# Altium PCB PCB1.PcbDoc
Units mil, origin at the board's own origin, x right, y up, seen from the top; angles counter-clockwise.
Board outline 1566.93 x 1488.19 mil, 4 copper layers (Top Layer, Int1 (GND), Int2 (PWR), Bottom Layer), stack 62.449 mil thick; 30 components, 72 nets, 200 pads, 2 vias.
Unrouted connection lines stored in the file: 69.
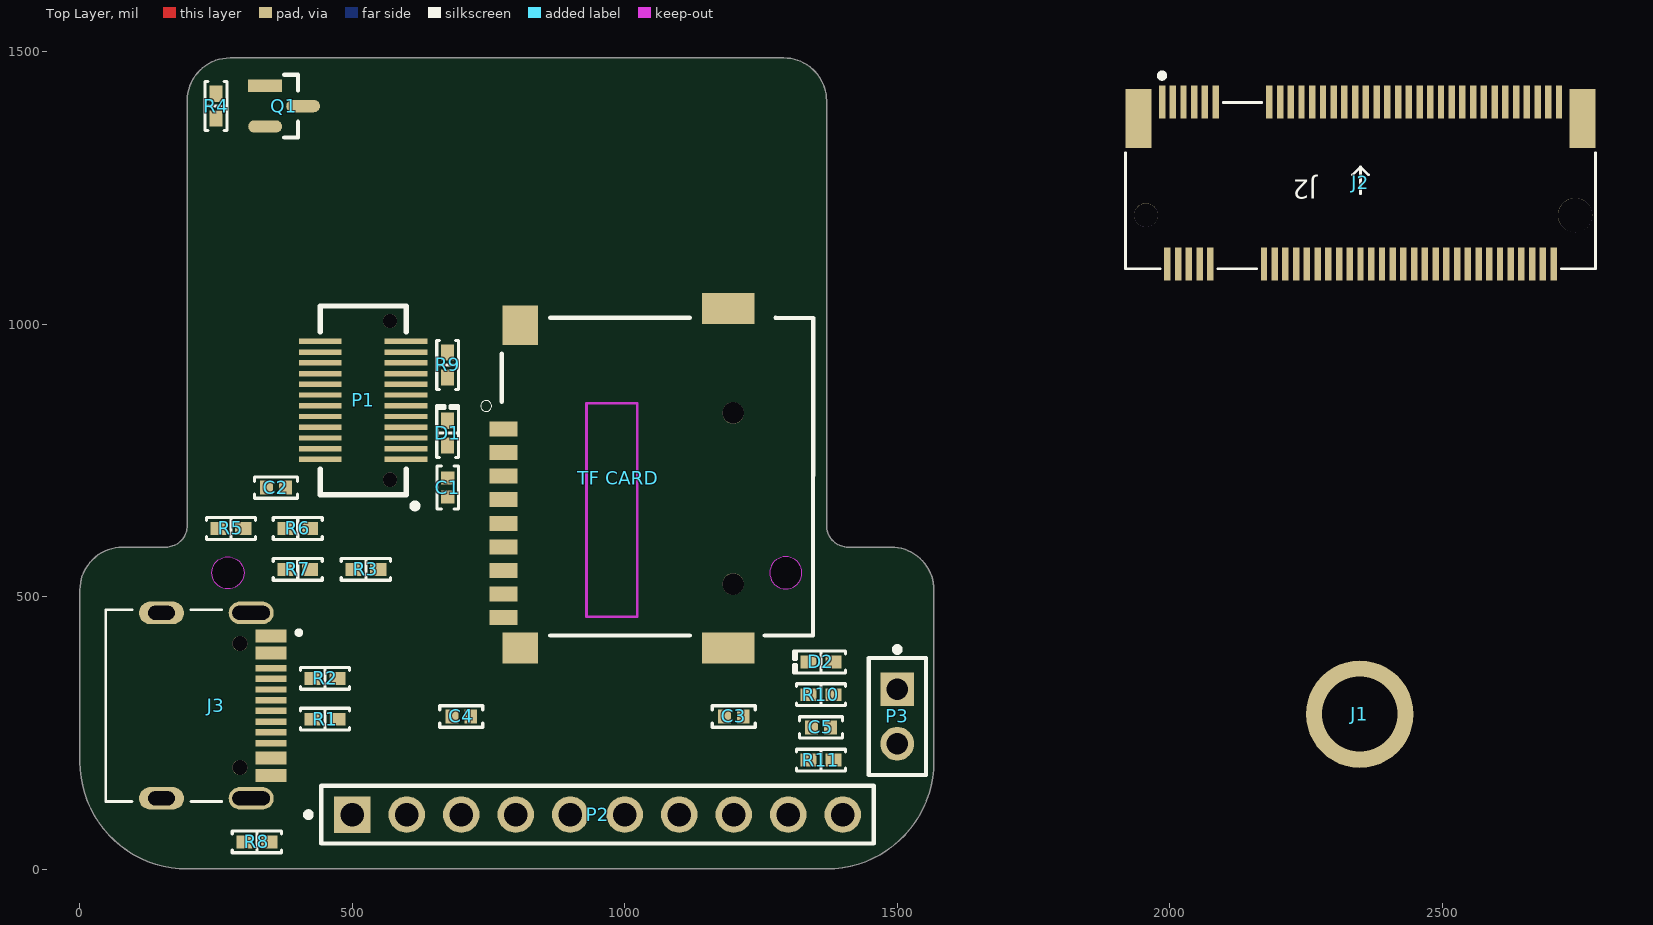
[diagram p0: Top Layer view]
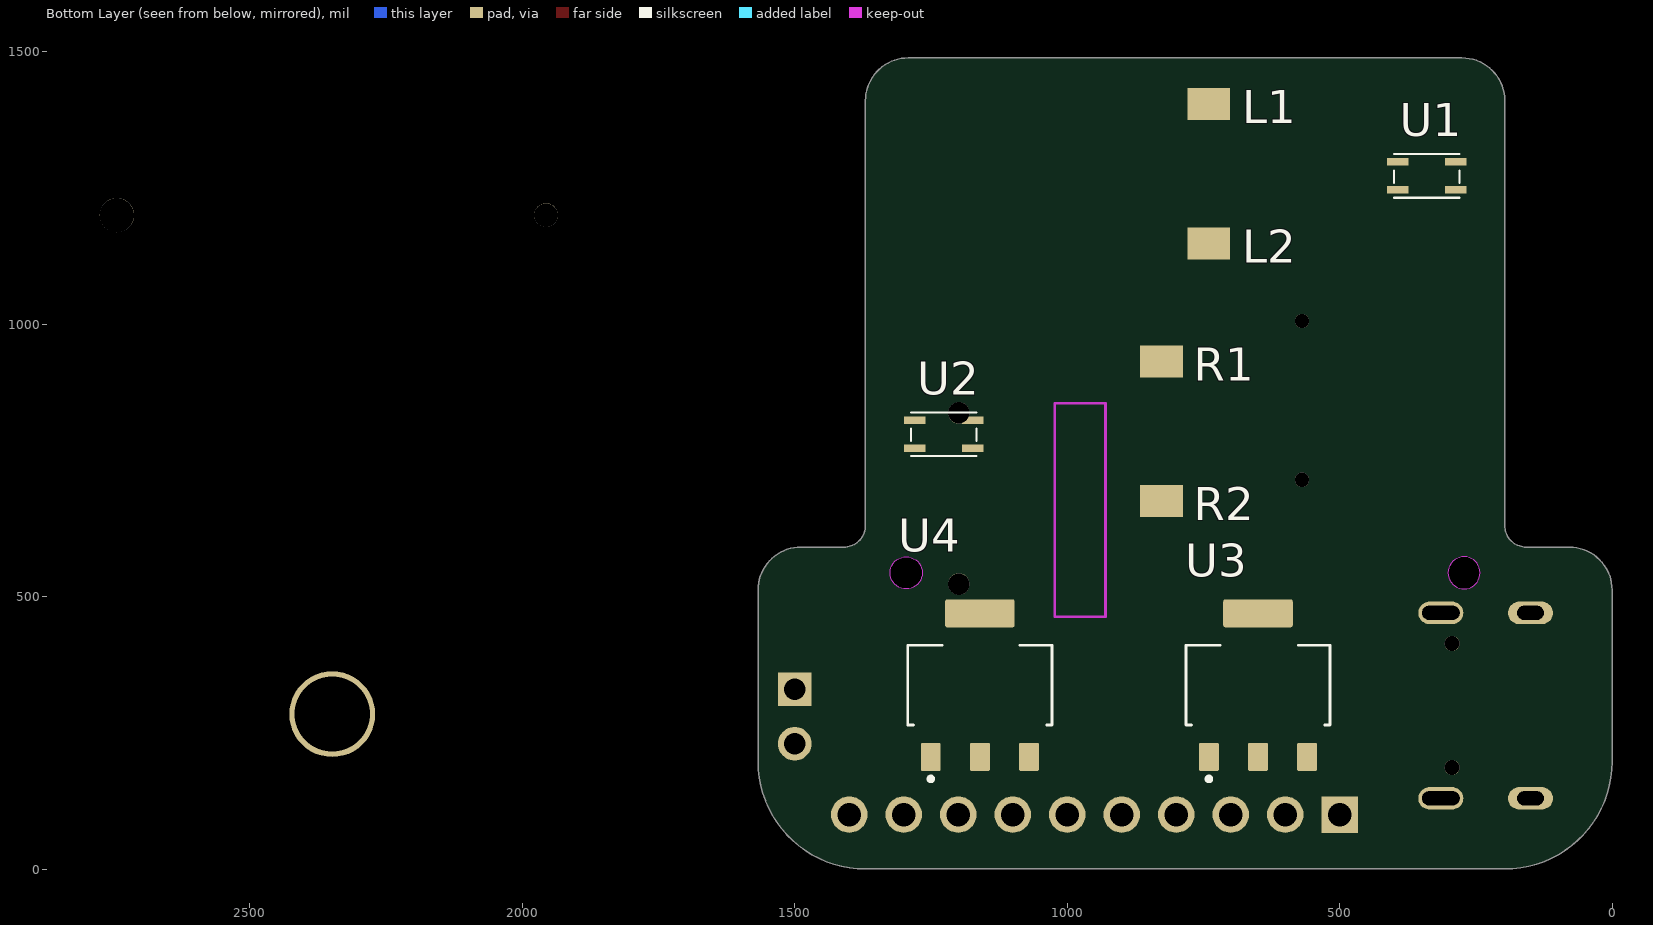
[diagram p1: Bottom Layer view, seen from below]
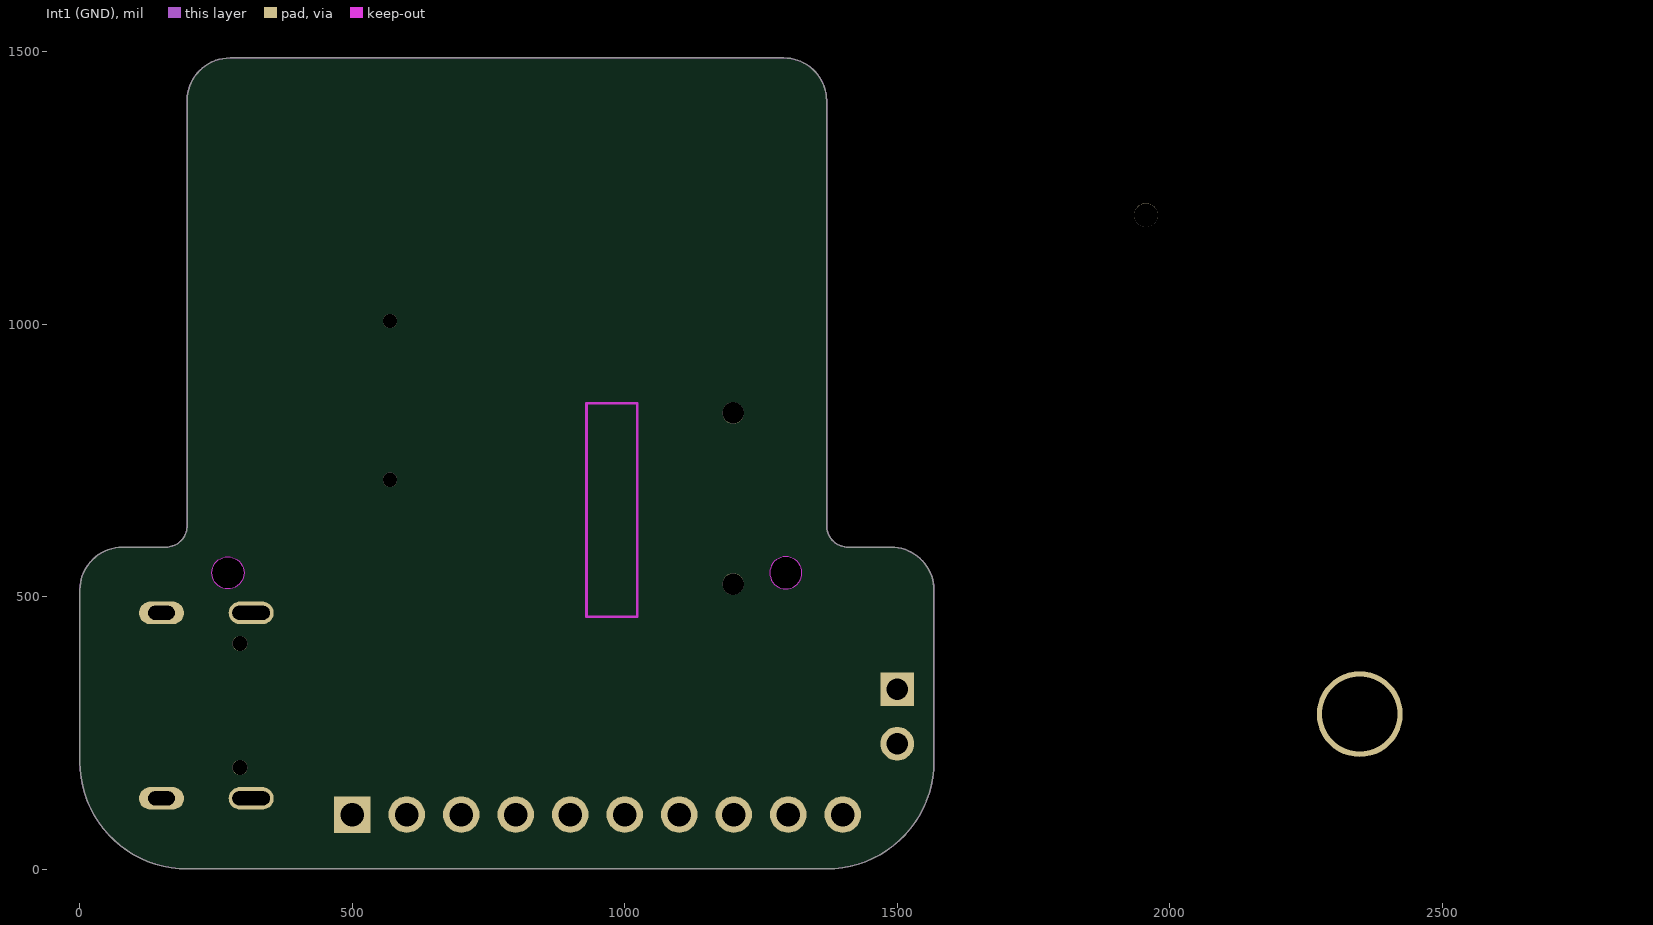
[diagram p2: Int1 (GND)]
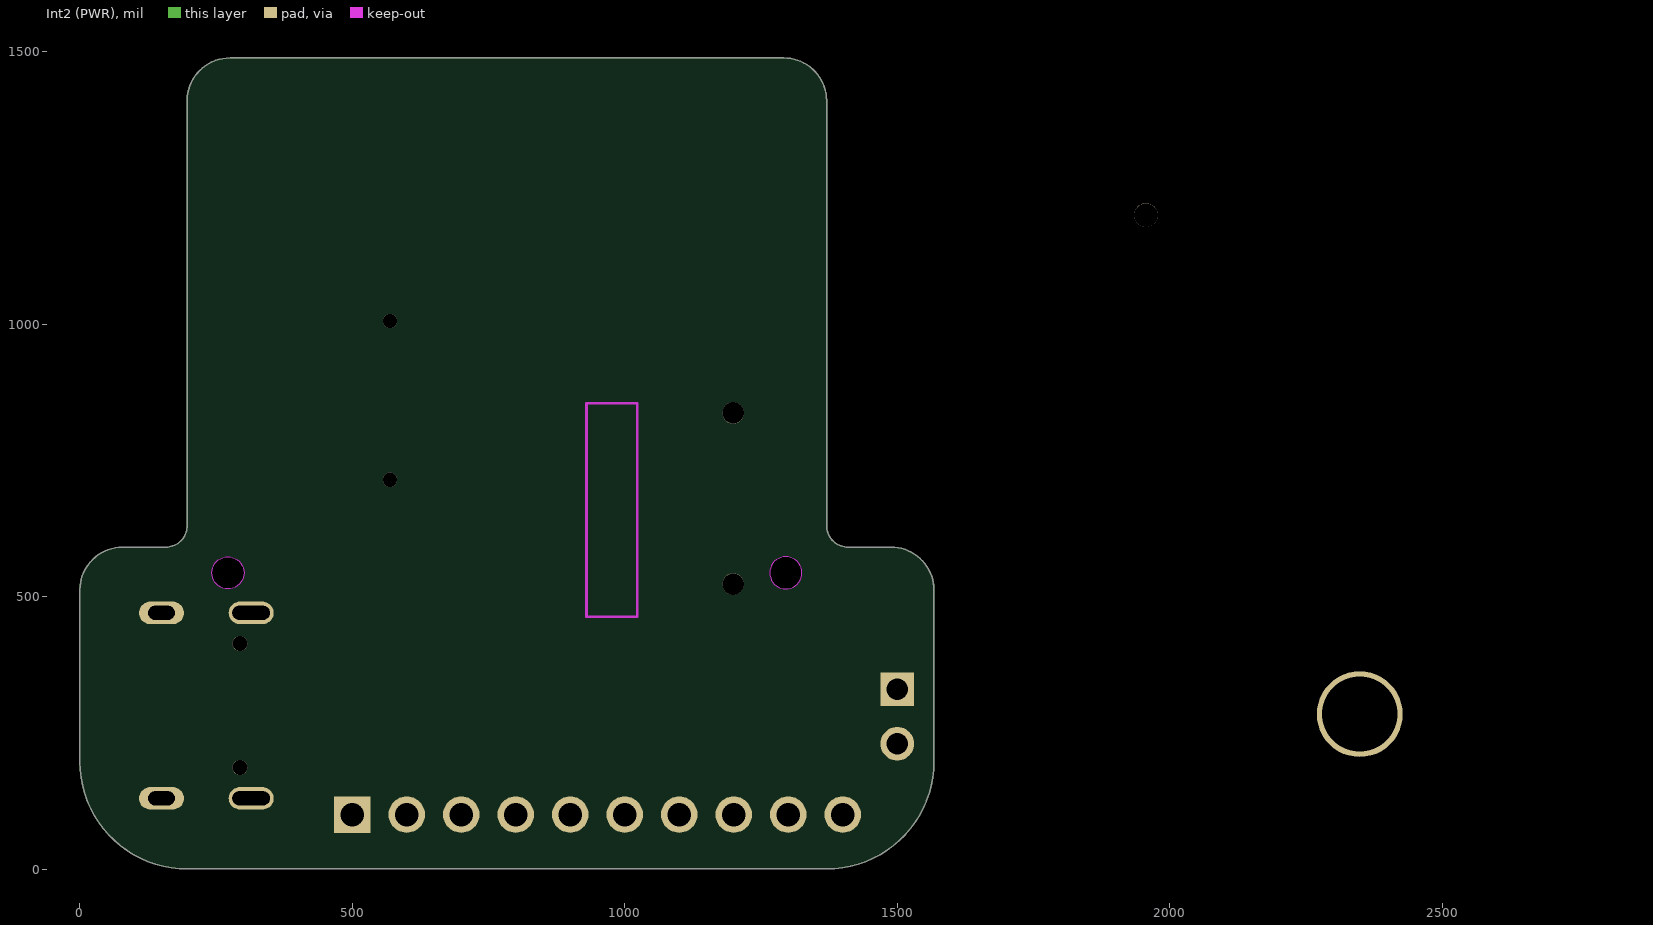
[diagram p3: Int2 (PWR)]

## Layer stack, top to bottom
Top Solder: solder mask 0.6, SM-001, Dk 3.8
Top Layer: signal copper 1.378
Dielectric 1: prepreg 8.284, PP-017, Dk 4.5
Int1 (GND): signal copper 0.598
Dielectric 2: core 41.929, Core-039, Dk 4.48
Int2 (PWR): signal copper 0.598
Dielectric 3: prepreg 8.284, PP-017, Dk 4.5
Bottom Layer: signal copper 1.378
Bottom Solder: solder mask 0.6, SM-001, Dk 3.8

## Board outline
0.25,197.1 0.25,512.06 cw(c78.99,512.06) 78.99,590.8 157.73,590.8 ccw(c157.73,630.17) 197.1,630.17 197.1,1409.7 cw(c275.84,1409.7) 275.84,1488.44 1291.59,1488.44 cw(c1291.59,1409.7) 1370.33,1409.7 1370.33,630.17 ccw(c1409.7,630.17) 1409.7,590.8 1488.44,590.8 cw(c1488.44,512.06) 1567.18,512.06 1567.18,197.1 cw(c1370.33,197.1) 1370.33,0.25 197.1,0.25 cw(c197.1,197.1)
cut-out: 1266,543.56 ccw(c1295.53,543.56) 1295.53,514.03 ccw(c1295.53,543.56) 1325.05,543.56 ccw(c1295.53,543.56) 1295.53,573.08 ccw(c1295.53,543.56)
cut-out: 271.9,514.03 cw(c271.9,543.56) 242.38,543.56 cw(c271.9,543.56) 271.9,573.08 cw(c271.9,543.56) 301.43,543.56 cw(c271.9,543.56)

## Design rules (kind name [scope] priority, off if disabled: settings)
BoardOutlineClearance [All] p1: gap=7.87 ignorepadtopadclearanceinfootprint=FALSE except(15.75: Arc-SplitBarrior Arc-SplitContinuation Track-SplitBarrior Track-SplitContinuation SMDPad-SplitBarrior SMDPad-SplitContinuation THPad-SplitBarrior THPad-SplitContinuation Via-SplitBarrior Via-SplitContinuation Fill-SplitBarrior Fill-SplitContinuation Poly-SplitBarrior Poly-SplitContinuation Region-SplitBarrior Region-SplitContinuation Text-SplitBarrior Text-SplitContinuation)
Clearance [All] p1: gap=7.87 ignorepadtopadclearanceinfootprint=FALSE except(0: Arc-Text Track-Text SMDPad-Text THPad-Text Via-Text Fill-Text Poly-Text Region-Text Text-Text; 3.5: Arc-Arc Arc-Track Arc-SMDPad Track-Track Track-SMDPad SMDPad-SMDPad; 5: Arc-Via Track-Via SMDPad-Via THPad-Via Via-Via)
DiffPairsRouting [All] p1: maxlimit=10 minlimit=10 mostfreqgap=10 toplayer_minwidth=15 toplayer_maxwidth=15 toplayer_prefwidth=15 midlayer1_minwidth=15 midlayer1_maxwidth=15 midlayer1_prefwidth=15 midlayer2_minwidth=15 midlayer2_maxwidth=15 midlayer2_prefwidth=15 bottomlayer_minwidth=15 bottomlayer_maxwidth=15 bottomlayer_prefwidth=15 maxuncoupledlength=500
HoleSize [All] p1: absolutevalues=TRUE maxlimit=248.03 minlimit=7.87 maxpercent=80.000 minpercent=20.000
MinimumAnnularRing [All] p1: minimumring=3
MinimumSolderMaskSliver [All] p1: minsoldermaskwidth=3.94
PlaneClearance [All] p1: clearance=5
PlaneConnect [All] p1: pad.planeconnectstyle=Relief pad.reliefexpansion=5 pad.reliefentries=4 pad.reliefconductorwidth=5 pad.reliefairgap=5 via.planeconnectstyle=Direct via.reliefexpansion=20 via.reliefentries=4 via.reliefconductorwidth=10 via.reliefairgap=10
PolygonConnect [All] p1: thpad.connectstyle=Relief thpad.reliefconductorwidth=5 thpad.reliefentries=4 thpad.polygonreliefangle="45 Angle" thpad.airgapwidth=5 smdpad.connectstyle=Relief smdpad.reliefconductorwidth=5 smdpad.reliefentries=4 smdpad.polygonreliefangle="90 Angle" smdpad.airgapwidth=5 via.connectstyle=Direct via.reliefconductorwidth=10 via.reliefentries=4 via.polygonreliefangle="90 Angle" via.airgapwidth=10
RoutingVias [All] p1: holewidth=7.87 width=11.81 viastyle="Through Hole" minholewidth=7.87 minwidth=11.81 maxholewidth=39.37 maxwidth=78.74
SilkToSilkClearance [All] p1: silktosilkclearance=5.91
SilkToSolderMaskClearance [IsPad] p1: minsilkscreentomaskgap=5.91 clearancetoexposedcopper=TRUE
SolderMaskExpansion [All] p1: expansion=4 istentingtop=FALSE
Width [All] p1: maxlimit=100 minlimit=3.5 preferedwidth=3.5
23 further rules are at their usual default settings.

## Classes and differential pairs
differential pair USB0: +USB0_P -USB0_N
differential pair USB0_: +USB0__P -USB0__N
differential pair MCSI-D1: +MCSI-D1_P -MCSI-D1_N
differential pair MCSI-D0: +MCSI-D0_P -MCSI-D0_N
differential pair MCSI-CK: +MCSI-CK_P -MCSI-CK_N

## Components (designator, comment, footprint, x,y, rotation, side; value= is the part's Value field where it differs from the comment)
C1 "10 µF" "CAP 0402_1005" 675,700 r270 top
C2 "10 µF" "CAP 0402_1005" 360,700 r180 top
C3 "10 µF" "CAP 0402_1005" 1200,280 r0 top
C4 "22 µF" "CAP 0402_1005" 700,280 r0 top
C5 "10 µF" "CAP 0402_1005" 1360,260 r180 top
D1 "Green" "LED 0402_1005 GREEN" 675,800 r90 top
D2 "Red" "LED 0402_1005 RED" 1360,380 r180 top
J1 "Socket" "M.2 SMT-FEMALE - FULL" 2348.62,284.26 r180 top
J2 "NGFF-67P_B-KEY座子 4.2H高" M2-67P0R50_B_FEMALE 2350,1200 r0 top
J3 "TYPE-C-31-M-12" HRO_TYPE-C-31-M-12 150,300 r270 top
P1 "CAMERA_BTB" F_24PIN 520,860 r180 top
P2 "HEADER 2.54" FP-61301011121-MFG 950,100 r0 top
P3 "TSW-102-07-L-S" FP-TSW-102-07-L-S-MFG 1500,280 r270 top
Q1 "SI2302" FP-S-03946-IPC_B 375,1400 r0 top
R1 "22 Ohms" "RES 0402_1005" 450,275 r180 top
R2 "22 Ohms" "RES 0402_1005" 450,350 r0 top
R3 "1.5 kOhms" "RES 0402_1005" 525,550 r180 top
R4 "10 kOhms" "RES 0402_1005" 250,1400 r270 top
R5 "1.5 kOhms" "RES 0402_1005" 277.36,625 r0 top
R6 "10 kOhms" "RES 0402_1005" 400,625 r0 top
R7 "5.1 kOhms" "RES 0402_1005" 400,550 r0 top
R8 "5.1 kOhms" "RES 0402_1005" 325,50 r0 top
R9 "10 kOhms" "RES 0402_1005" 675,925 r90 top
R10 "10 kOhms" "RES 0402_1005" 1360,320 r0 top
R11 "1 kOhms" "RES 0402_1005" 1360,200 r0 top
"TF CARD" "TF-01A" TF-01A 1060,720 r90 top locked
U1 "GP1S196HCZ0F" SMD-4_L3.1-W2.0-P1.3-BR 340.55,1271.89 r0 bottom
U2 "GP1S196HCZ0F" SMD-4_L3.1-W2.0-P1.3-BR 1226.61,797.87 r0 bottom
U3 "AMS1117-1.8" SOT229P700X180-4N 650,337.6 r180 bottom locked
U4 "AMS1117-3.3" SOT229P700X180-4N 1160.24,337.6 r180 bottom locked

## Footprints (in the part's own frame and the unit in brackets; to place one, negate y for a bottom-side part, rotate by r counter-clockwise, add the part's x,y. Pads: shape width x height; smd on the part's side, far side on the other; paste and mask are expansions set on the pad)
"CAP 0402_1005" [mm] "Chip Capacitor, 2-Leads, Body 1.02x0.51mm, IPC Medium Density"
  rect 0.6x0.64 smd: 1(-0.44,0) 2(0.44,0)
  silkscreen extent -1,-0.5 1,0.5, body extent -0.5,-0.26 0.5,0.26, height 0.52
F_24PIN [mm] "0.5双槽板对板母座，24P"
  rect 2x0.25 smd: 1(-2,2.75) 2(-2,2.25) 3(-2,1.75) 4(-2,1.25) 5(-2,0.75) 6(-2,0.25) 7(-2,-0.25) 8(-2,-0.75) 9(-2,-1.25) 10(-2,-1.75) 11(-2,-2.25) 12(-2,-2.75) 13(2,-2.75) 14(2,-2.25) 15(2,-1.75) 16(2,-1.25) 17(2,-0.75) 18(2,-0.25) 19(2,0.25) 20(2,0.75) 21(2,1.25) 22(2,1.75) 23(2,2.25) 24(2,2.75)
  silkscreen extent -2.54,-4.4 2,5.04
FP-61301011121-MFG [mm]
  rect 1.7x1.7 hole 1.1 paste-1000 mask+0: 1(-11.43,0)
  round 1.7 hole 1.1 paste-1000 mask+0: 2(-8.89,0) 3(-6.35,0) 4(-3.81,0) 5(-1.27,0) 6(1.27,0) 7(3.81,0) 8(6.35,0) 9(8.89,0) 10(11.43,0)
  silkscreen extent -13.6,-1.35 12.88,1.35, body extent -12.98,-1.45 12.98,1.45, height 0.25
FP-S-03946-IPC_B [mm]
  rect 1.574x0.576 smd paste+0 mask+0: 1(-0.885,0.95)
  rrect100% 1.574x0.576 smd paste+0 mask+0: 2(-0.885,-0.95) 3(0.885,0)
  silkscreen extent 0,-1.46 0.65,1.46, body extent -1.92,-1.71 1.92,1.71, height 0.25
FP-TSW-102-07-L-S-MFG [mm]
  rect 1.57x1.57 hole 1.02 paste-1000 mask+0: 1(-1.27,0)
  round 1.57 hole 1.02 paste-1000 mask+0: 2(1.27,0)
  silkscreen extent -3.25,-1.34 2.73,1.34, body extent -2.83,-1.44 2.83,1.44, height 0.25
HRO_TYPE-C-31-M-12 [mm]
  rect 0.6x1.45 smd: A1B12(-3.25,5.095) A4B9(-2.45,5.095) B1A12(3.25,5.095) B4A9(2.45,5.095)
  rect 0.3x1.45 smd: A5(-1.25,5.095) A6(-0.25,5.095) A7(0.25,5.095) A8(1.25,5.095) B5(1.75,5.095) B6(0.75,5.095) B7(-0.75,5.095) B8(-1.75,5.095)
  oval 1.05x2.1 hole 0.65 slot 1.75 at 90 deg: S1(-4.32,4.18) S2(4.32,4.18)
  oval 1.05x2.1 hole 0.65 slot 1.25 at 90 deg: S3(-4.32,0) S4(4.32,0)
  round 0.7 hole 0.7 unplated: ""(-2.89,3.65) ""(2.89,3.65)
  silkscreen extent -4.47,-2.6 4.47,6.5, body extent -4.47,-2.6 4.47,5.31, height 3.31
"LED 0402_1005 GREEN" [mm] "Chip Diode, 2-Leads, Body 1.00x0.50mm, IPC Medium Density"
  rect 0.75x0.6 smd: 1(-0.575,0) 2(0.575,0)
  silkscreen extent -1.14,-0.51 1.27,0.51, body extent -0.5,-0.25 0.5,0.25, height 0.21
"LED 0402_1005 RED" [mm] "Chip Diode, 2-Leads, Body 1.00x0.50mm, IPC Medium Density"
  rect 0.75x0.6 smd: 1(-0.575,0) 2(0.575,0)
  silkscreen extent -1.14,-0.51 1.27,0.51, body extent -0.5,-0.25 0.5,0.25, height 0.21
M2-67P0R50_B_FEMALE [mm]
  rect 0.3x1.55 smd mask+0.051: 1(-9.25,5.275) 2(-9,-2.275) 3(-8.75,5.275) 4(-8.5,-2.275) 5(-8.25,5.275) 6(-8,-2.275) 7(-7.75,5.275) 8(-7.5,-2.275) 9(-7.25,5.275) 10(-7,-2.275) 11(-6.75,5.275) 20(-4.5,-2.275) 21(-4.25,5.275) 22(-4,-2.275) 23(-3.75,5.275) 24(-3.5,-2.275) 25(-3.25,5.275) 26(-3,-2.275) 27(-2.75,5.275) 28(-2.5,-2.275) 29(-2.25,5.275) 30(-2,-2.275) 31(-1.75,5.275) 32(-1.5,-2.275) 33(-1.25,5.275) 34(-1,-2.275) 35(-0.75,5.275) 36(-0.5,-2.275) 37(-0.25,5.275) 38(0,-2.275) 39(0.25,5.275) 40(0.5,-2.275) 41(0.75,5.275) 42(1,-2.275) 43(1.25,5.275) 44(1.5,-2.275) 45(1.75,5.275) 46(2,-2.275) 47(2.25,5.275) 48(2.5,-2.275) 49(2.75,5.275) 50(3,-2.275) 51(3.25,5.275) 52(3.5,-2.275) 53(3.75,5.275) 54(4,-2.275) 55(4.25,5.275) 56(4.5,-2.275) 57(4.75,5.275) 58(5,-2.275) 59(5.25,5.275) 60(5.5,-2.275) 61(5.75,5.275) 62(6,-2.275) 63(6.25,5.275) 64(6.5,-2.275) 65(6.75,5.275) 66(7,-2.275) 67(7.25,5.275) 68(7.5,-2.275) 69(7.75,5.275) 70(8,-2.275) 71(8.25,5.275) 72(8.5,-2.275) 73(8.75,5.275) 74(9,-2.275) 75(9.25,5.275)
  round 1.1 hole 1.1 mask+0.051: " "(-10,0)
  round 1.6 / inner round 1.524 / far side round 1.6 hole 1.6 mask+0.051: " "(10,0)
  rect 1.2x2.75 smd mask+0.051: SH1(-10.35,4.5) SH2(10.35,4.5)
  silkscreen extent -10.95,-2.5 10.95,6.62, body extent -10.95,-2.85 10.95,5.85, height 4.09
"M.2 SMT-FEMALE - FULL" [mm] "Connector; Plug"
  round 5 / inner round 4 / far side round 4 hole 3.5 paste+0 mask+0.051: 1(0,0)
  body extent -2.26,-2.24 2.24,2.26, height 2.46
"RES 0402_1005" [mm] "Chip Resistor, 2-Leads, Body 1.0x0.5mm, IPC Medium Density"
  rect 0.75x0.6 smd: 1(-0.575,0) 2(0.575,0)
  silkscreen extent -1.14,-0.51 1.14,0.51, body extent -0.5,-0.25 0.5,0.25, height 0.35
SMD-4_L3.1-W2.0-P1.3-BR [mil]
  rect 39.4x13.8 smd mask+2: 1(53.2,-25.6) 2(53.2,25.6) 3(-53.2,25.6) 4(-53.2,-25.6)
  silkscreen extent -60,-40 60,40
SOT229P700X180-4N [mm]
  rrect15% 0.93x1.31 smd: 1(-2.29,-3.345) 2(0,-3.345) 3(2.29,-3.345)
  rrect15% 3.24x1.31 smd: 4(0,3.345)
  silkscreen extent -3.36,-4.47 3.36,1.86, body extent -3.25,-3.5 3.25,3.5, height 1.78
TF-01A [mm]
  rect 0.7x1.3 smd: 1(2.23,7.174) 2(1.13,7.174) 3(0.03,7.174) 4(-1.07,7.174) 5(-2.17,7.174) 6(-3.27,7.174) 7(-4.37,7.174) 8(-5.47,7.174) CD1(-6.57,7.174)
  rect 1.448x1.651 smd: MP1(-7.989,6.4)
  rect 1.448x2.438 smd: MP2(-7.989,-3.3) MP3(7.836,-3.3)
  rect 1.854x1.651 smd: MP4(7.061,6.4)
  round 1 hole 1 unplated: ""(-5.004,-3.531) ""(2.972,-3.531)
  Keep-Out Layer lines w0.127: -6.528,3.302 3.429,3.302 3.429,0.94 -6.528,0.94 -6.528,3.302
  silkscreen extent -7.4,-7.26 7.4,8.24, body extent -8.07,-7.69 8.03,7.51, height 2

## Part data
C1 C2 C3 C5: library part GRM155R60E106ME16D, "CAP CER 10UF 2.5V X5R 0402", Device Package="0402 (1005 Metric)", manufacturer="Murata Electronics", Operating Temperature="-55°C ~ 85°C", Supplier Part Number 1=490-10692-1-ND, Temperature Coefficient=X5R, Tolerance=±20%, Voltage - Rated=2.5V, Applications="General Purpose", Capacitance="10 µF", componentlink1description=Datasheet, componentlink1url=https://search.murata.co.jp/Ceramy/image/img/A01X/G101/ENG/GRM155R60E106ME16-01.pdf, componentlink2description="DigiKey Link", componentlink2url=https://www.digikey.com/en/products/detail/murata-electronics/GRM155R60E106ME16D/4905100, lastupdated="2022/9/14 7:46:00", Lifecycle Status=Active, Minimum Order=1, Mounting Type="Surface Mount, MLCC", Package / Case="0402 (1005 Metric)", packaging=TapeAndReel, Part Number=GRM155R60E106ME16D, Part Status=Active, partid=6704, Price=0.02, series=GRM, Size / Dimension="0.039\" L x 0.020\" W (1.00mm x 0.50mm)", Supplier 1=DigiKey, Thickness (Max)="0.028\" (0.70mm)"
C4: library part GRM155R60E106ME16D, "CAP CER 10UF 2.5V X5R 0402", Capacitance="10 µF", Device Package="0402 (1005 Metric)", manufacturer="Murata Electronics", Operating Temperature="-55°C ~ 85°C", Supplier Part Number 1=490-10692-1-ND, Temperature Coefficient=X5R, Tolerance=±20%, Voltage - Rated=2.5V, Applications="General Purpose", componentlink1description=Datasheet, componentlink1url=https://search.murata.co.jp/Ceramy/image/img/A01X/G101/ENG/GRM155R60E106ME16-01.pdf, componentlink2description="DigiKey Link", componentlink2url=https://www.digikey.com/en/products/detail/murata-electronics/GRM155R60E106ME16D/4905100, lastupdated="2022/9/14 7:46:00", Lifecycle Status=Active, Minimum Order=1, Mounting Type="Surface Mount, MLCC", Package / Case="0402 (1005 Metric)", packaging=TapeAndReel, Part Number=GRM155R60E106ME16D, Part Status=Active, partid=6704, Price=0.02, series=GRM, Size / Dimension="0.039\" L x 0.020\" W (1.00mm x 0.50mm)", Supplier 1=DigiKey, Thickness (Max)="0.028\" (0.70mm)"
D1: library part EAST10052GA0, "LED GREEN CLEAR 2SMD", Current - Test=5mA, Device Package="0402 (1005 Metric)", Lens Color=Colorless, manufacturer="Everlight Electronics Co Ltd", Supplier Device Package=2-SMD, Supplier Part Number 1=1080-1557-1-ND, Voltage - Forward (Vf) (Typ)=2.95V, Color=Green, componentlink1description=Datasheet, componentlink1url=https://everlightamericas.com/index.php?controller=attachment&id_attachment=3256, componentlink2description="DigiKey Link", componentlink2url=https://www.digikey.com/en/products/detail/everlight-electronics-co-ltd/EAST10052GA0/8510366, Configuration=Standard, Height (Max)=0.25mm, lastupdated="2022/9/14 8:36:15", Lens Size="1.00mm x 0.50mm", Lens Style="Rectangle with Flat Top", Lens Transparency=Clear, Lifecycle Status=Active, Minimum Order=1, Mounting Type="Surface Mount", Package / Case="0402 (1005 Metric)", packaging=TapeAndReel, Part Number=EAST10052GA0, Part Status=Active, partid=696, Price=0.06, series=-, Size / Dimension="1.00mm L x 0.50mm W", Supplier 1=DigiKey, Viewing Angle=120°, Wavelength - Peak=518nm
D2: library part QBLP595-R-2897, "0402 LED RED, CLEAR LENS, 330MCD", Current - Test=20mA, Device Package="0402 (1005 Metric)", Lens Color=Colorless, manufacturer="QT Brightek (QTB)", Millicandela Rating=330mcd, Supplier Device Package=0402, Supplier Part Number 1=1516-QBLP595-R-2897CT-ND, Voltage - Forward (Vf) (Typ)=2.1V, Color=Red, componentlink1description=Datasheet, componentlink1url=https://www.qt-brightek.com/datasheet/QBLP595-R-2897.pdf, componentlink2description="DigiKey Link", componentlink2url=https://www.digikey.com/en/products/detail/qt-brightek-qtb/QBLP595-R-2897/16499677, Configuration=Standard, Height (Max)=0.60mm, lastupdated="2022/9/14 8:36:36", Lens Size="0.70mm x 0.50mm", Lens Style="Rectangle with Flat Top", Lens Transparency=Clear, Lifecycle Status=Active, Minimum Order=1, Mounting Type="Surface Mount", Package / Case="0402 (1005 Metric)", packaging=TapeAndReel, Part Number=QBLP595-R-2897, Part Status=Active, partid=1086, Price=0.07, series=QBLP595, Size / Dimension="1.00mm L x 0.50mm W", Supplier 1=DigiKey, Viewing Angle=120°, Wavelength - Dominant=620nm
J2: library part NGFF-67P_B-MALE
J3: "USB Connectors 24 Receptacle 1 8.94*7.3mm RoHS", Package=None, Availability=Unavailable, MF="{'manufacturer': u'HRO Electronics Co., Ltd.'}", MP=TYPE-C-31-M-12, Price=None
P1: library part "Header 12X2A", "Header, 12-Pin, Dual row", LatestRevisionDate=17-Jul-2002, LatestRevisionNote="Re-released for DXP Platform.", Publisher="Altium Limited"
P2: library part CMP-1502-01082-3, "CONN HEADER VERT 10POS 2.54MM", Color=Black, Current Rating=3A, Flammability Rating="UL94 V-0", Insulation Resistance=1GR, Max Operating Temperature=105°C, Min Operating Temperature=-40°C, Package Quantity=1000, Voltage Rating=250V, Connector Type=Header, Contact Finish - Mating=GOLD, Contact Gender=Male, Contact Material="Copper Alloy", Contact Mating Length=0.236inch, Contact Plating=Gold, Contact Shape=Square, Contact Type="Male Pin", Fastening Type=Pull, Gender=Male, Height=11.54mm, Housing Material=PBT, Insulation Color=Black, Insulation Material=Nylon, Length=2.54mm, Mount="Through Hole", Number of Contacts=10, Number of Positions=10, Number of Rows=1, Orientation=Straight, packaging=Bulk, Pitch=2.54mm, RoHS Compliant=Yes, series=WR-PHD, Termination=Solder, Width=25.4mm
P3: library part CMP-02766-001428-1, "CONN HEADER VERT 2POS 2.54MM", Color=Black, Current Rating=7.6A, Max Operating Temperature=125°C, Max Voltage Rating (AC)=550V, Min Operating Temperature=-55°C, Package Quantity=1, Connector Type="Male Pin", Contact Material=Bronze, Contact Mating Length=0.23inch, Contact Plating=Gold, Contact Type="Male Pin", Depth=2.54mm, Gender=Male, Housing Color=Black, Housing Material=Polyester, Lead Free="Lead Free", Length=5.08mm, Max Current Rating=7.6A, Mount="Through Hole", Number of Contacts=2, Number of Positions=2, Number of Rows=1, Orientation=Straight, packaging=Bulk, Pitch=2.54mm, Radiation Hardening=No, REACH SVHC="No SVHC", RoHS Compliant=Yes, series=TSW, Termination=Solder, Voltage Rating=550V, Width=2.54mm
Q1: library part CMP-02550-000243-1, "MOSFET N-CH 20V 2.9A SOT23-3", Case/Package=SOT-23, Continuous Drain Current (ID)=2.6A, Drain to Source Resistance=57mR, Drain to Source Voltage (Vdss)=20V, Gate to Source Voltage (Vgs)=8V, Max Operating Temperature=150°C, Max Power Dissipation=710mW, Min Operating Temperature=-55°C, Package Quantity=3000, Fall Time=7ns, Lead Free="Lead Free", Mount="Surface Mount", Number of Channels=1, Number of Elements=1, Number of Pins=3, packaging="Tape and Reel", Power Dissipation=710mW, REACH SVHC="No SVHC", Rise Time=7ns, RoHS Compliant=Yes, Turn-Off Delay Time=30ns, Turn-On Delay Time=8ns, Weight=0.050717oz
R1 R2: library part SR0402FR-7W22RL, "RES 22 OHM 1% 1/8W 0402", Device Package="0402 (1005 Metric)", manufacturer=Yageo, Operating Temperature="-55°C ~ 155°C", Power (Watts)="0.125W, 1/8W", Ratings=AEC-Q200, Supplier Device Package=0402, Supplier Part Number 1=YAG5820CT-ND, Temperature Coefficient=±100ppm/°C, Tolerance=±1%, componentlink1description=Datasheet, componentlink1url=http://www.yageo.com/documents/recent/PYu-SR_D_F%20tol_RoHS_L_4.pdf, componentlink2description="DigiKey Link", componentlink2url=https://www.digikey.com/en/products/detail/yageo/SR0402FR-7W22RL/9373094, Composition="Thick Film", Features="Automotive AEC-Q200, Pulse Withstanding", Height - Seated (Max)="0.016\" (0.40mm)", lastupdated="2022/9/14 8:02:27", Lifecycle Status=Active, Minimum Order=1, Number of Terminations=2, Package / Case="0402 (1005 Metric)", packaging=TapeAndReel, Part Number=SR0402FR-7W22RL, Part Status=Active, partid=4390, Price=0.07, Resistance="22 Ohms", series=SR, Size / Dimension="0.039\" L x 0.020\" W (1.00mm x 0.50mm)", Supplier 1=DigiKey
R3 R5: library part PTN0402Y1501BST1, "PTN0402 10PPM 1.5K 0.1% S T1 E1", Device Package="0402 (1005 Metric)", manufacturer="Vishay Dale Thin Film", Operating Temperature="-55°C ~ 155°C", Power (Watts)="0.05W, 1/20W", Supplier Device Package=0402, Supplier Part Number 1=764-PTN0402Y1501BST1CT-ND, Temperature Coefficient=±10ppm/°C, Tolerance=±0.1%, componentlink1description=Datasheet, componentlink1url=https://www.vishay.com/docs/60026/ptn.pdf, componentlink2description="DigiKey Link", componentlink2url=https://www.digikey.com/en/products/detail/vishay-dale-thin-film/PTN0402Y1501BST1/12820654, Composition="Thin Film", Features="Anti-Sulfur, Moisture Resistant, Non-Inductive", Height - Seated (Max)="0.033\" (0.84mm)", lastupdated="2022/9/14 8:01:19", Lifecycle Status=Active, Minimum Order=1, Number of Terminations=2, Package / Case="0402 (1005 Metric)", packaging=TapeAndReel, Part Number=PTN0402Y1501BST1, Part Status=Active, partid=59552, Price=0.27, Resistance="1.5 kOhms", series=PTN, Size / Dimension="0.042\" L x 0.022\" W (1.07mm x 0.56mm)", Supplier 1=DigiKey
R4 R6: library part P2TC0402D1002LNTA, "P2TC0402 2PPM/C 10K 0,01% N TA", Device Package="0402 (1005 Metric)", manufacturer="Vishay Sfernice", Operating Temperature="-55°C ~ 155°C", Power (Watts)="0.063W, 1/16W", Supplier Device Package=0402, Supplier Part Number 1=716-P2TC0402D1002LNTACT-ND, Temperature Coefficient=±2ppm/°C, Tolerance=±0.01%, componentlink1description=Datasheet, componentlink1url=https://www.vishay.com/docs/53080/p2tc.pdf, componentlink2description="DigiKey Link", componentlink2url=https://www.digikey.com/en/products/detail/vishay-sfernice/P2TC0402D1002LNTA/11657715, Composition="Thin Film", Features="Anti-Sulfur, Moisture Resistant", Height - Seated (Max)="0.025\" (0.63mm)", lastupdated="2022/9/14 8:01:18", Lifecycle Status=Active, Minimum Order=1, Number of Terminations=2, Package / Case="0402 (1005 Metric)", packaging=TapeAndReel, Part Number=P2TC0402D1002LNTA, Part Status=Active, partid=59061, Price=13.14, Resistance="10 kOhms", series=P2TC, Size / Dimension="0.039\" L x 0.024\" W (1.00mm x 0.60mm)", Supplier 1=DigiKey
R7 R8: library part RN73R1ETTP5101B25, "RES 5.1K OHM 0.1% 1/16W 0402", Device Package="0402 (1005 Metric)", manufacturer="KOA Speer Electronics, Inc.", Operating Temperature="-55°C ~ 155°C", Power (Watts)="0.063W, 1/16W", Ratings=AEC-Q200, Supplier Device Package=0402, Supplier Part Number 1=2019-RN73R1ETTP5101B25CT-ND, Temperature Coefficient=±25ppm/°C, Tolerance=±0.1%, componentlink1description=Datasheet, componentlink1url=//media.digikey.com/pdf/Data%20Sheets/KOA%20Speer/RN73R_Type_DS.pdf, componentlink2description="DigiKey Link", componentlink2url=https://www.digikey.com/en/products/detail/koa-speer-electronics-inc/RN73R1ETTP5101B25/9991854, Composition="Thin Film", Features="Automotive AEC-Q200, Moisture Resistant", Height - Seated (Max)="0.016\" (0.40mm)", lastupdated="2022/9/14 8:02:23", Lifecycle Status=Active, Minimum Order=1, Number of Terminations=2, Package / Case="0402 (1005 Metric)", packaging=TapeAndReel, Part Number=RN73R1ETTP5101B25, Part Status=Active, partid=5343, Price=0.06, Resistance="5.1 kOhms", series=RN73R, Size / Dimension="0.039\" L x 0.020\" W (1.00mm x 0.50mm)", Supplier 1=DigiKey
R9 R10: library part RP73PF1E10KBTD, "RES 10K OHM 0.1% 1/10W 0402", Device Package="0402 (1005 Metric)", manufacturer="TE Connectivity Passive Product", Operating Temperature="-55°C ~ 155°C", Power (Watts)="0.1W, 1/10W", Supplier Device Package=0402, Supplier Part Number 1=A127415CT-ND, Temperature Coefficient=±25ppm/°C, Tolerance=±0.1%, componentlink1description=Datasheet, componentlink1url=https://www.te.com/commerce/DocumentDelivery/DDEController?Action=srchrtrv&DocNm=1773272&DocType=DS&DocLang=English, componentlink2description="DigiKey Link", componentlink2url=https://www.digikey.com/en/products/detail/te-connectivity-passive-product/RP73PF1E10KBTD/8260957, Composition="Thin Film", Height - Seated (Max)="0.014\" (0.35mm)", lastupdated="2022/9/14 8:02:33", Lifecycle Status=Active, Minimum Order=1, Number of Terminations=2, Package / Case="0402 (1005 Metric)", packaging=TapeAndReel, Part Number=RP73PF1E10KBTD, Part Status=Active, partid=2434, Price=0.09, Resistance="10 kOhms", series="RP73, Holsworthy", Size / Dimension="0.039\" L x 0.020\" W (1.00mm x 0.50mm)", Supplier 1=DigiKey
R11: library part RNCF0402TKY1K00, "RES 1K OHM 0.01% 1/16W 0402", Device Package="0402 (1005 Metric)", manufacturer="Stackpole Electronics Inc", Operating Temperature="-55°C ~ 155°C", Power (Watts)="0.063W, 1/16W", Ratings=AEC-Q200, Supplier Device Package=0402, Supplier Part Number 1=RNCF0402TKY1K00CT-ND, Temperature Coefficient=±5ppm/°C, Tolerance=±0.01%, componentlink1description=Datasheet, componentlink1url=https://www.seielect.com/catalog/sei-rncf.pdf, componentlink2description="DigiKey Link", componentlink2url=https://www.digikey.com/en/products/detail/stackpole-electronics-inc/RNCF0402TKY1K00/5432231, Composition="Thin Film", Features="Automotive AEC-Q200", Height - Seated (Max)="0.014\" (0.35mm)", lastupdated="2022/9/14 8:01:36", Lifecycle Status=Active, Minimum Order=1, Number of Terminations=2, Package / Case="0402 (1005 Metric)", packaging=TapeAndReel, Part Number=RNCF0402TKY1K00, Part Status=Active, partid=20099, Price=0.88, Resistance="1 kOhms", series=RNCF, Size / Dimension="0.039\" L x 0.020\" W (1.00mm x 0.50mm)", Supplier 1=DigiKey
"TF CARD": "<b>Connector - Card Sockets 8 1.1mm SMD RoHS</b><p> Source: <a href=\"https://datasheet.lcsc.com/szlcsc/1903221101_Korean-Hroparts-Elec-TF-01A_C91145.pdf\"> Datasheet </a>", Package=None, Availability=Unavailable, MF="{'manufacturer': u'HRO Electronics Co., Ltd.'}", MP=TF-01A, Price=None
U1 U2: "Optical Sensor Through-Beam 0.043 (1.1mm) Phototransistor PCB Mount", Package="PCB Mount Sharp", Availability=Warning, Check_prices=https://www.snapeda.com/parts/GP1S196HCZ0F/Sharp%20Microelectronics/view-part/2699849/?ref=eda, MF="Sharp Microelectronics", MP=GP1S196HCZ0F, Price=None, Purchase-URL=https://pricing.snapeda.com/search/part/GP1S196HCZ0F/?ref=eda, SnapEDA_Link=https://www.snapeda.com/parts/GP1S196HCZ0F/Sharp%20Microelectronics/view-part/2699849/?ref=snap
U3 U4: library part AMS1117, "Sot223/Pkg 1-Amp 5-Volt Low Drop Out Voltage Regulatator", Package=None, Availability=Unavailable, MF="{'manufacturer': u'Advanced Monolithic Systems'}", MP=AMS1117, Price=None
J1: LatestRevisionDate=17-Jul-2002, LatestRevisionNote="Re-released for DXP Platform.", Publisher="Altium Limited"

## Free pads (board coordinates)
  rect 78.74x59.06 smd far side: 1(740.39,1403.79) 2(740.39,1147.89) 3(827.01,931.34) 4(827.01,675.43)

## Via types
v1: diameter 26.38, hole 26.38, Top Layer to Bottom Layer, 2 vias

## Nets (pads, with @x,y where several pads share a name; then routed paths per layer and width w, separated by ;. In a path a pad name is that pad's centre, name@x,y a point inside that pad or via, vN(x,y) a via of type N, cw(c..) or ccw(c..) an arc to the next point about the centre after c; other vN are vias at no path point)
1V8: C1.1 C4.1 J2.36 P1.1 Q1.1 R3.1 R4.1 R5.1 R6.1 U3.2 U3.4
3V3: "TF CARD.4" C2.1 C3.1 D1.1 D2.1 P1.24 U3.3 U4.2 U4.4
5V: C5.1 J2.74 J3.A4B9 J3.B4A9 P3.1 U4.3
AP-RESET: J2.2 Q1.2
CC1_1: J3.A5 R7.2
CC2_1: J3.B5 R8.2
CPUX-RX: J2.58 P2.9
CPUX-TX: J2.60 R11.1
GND: "TF CARD.6" "TF CARD.MP1" "TF CARD.MP2" "TF CARD.MP3" "TF CARD.MP4" C1.2 C2.2 C3.2 C4.2 C5.2 J1.1 J2.41 J2.47 J2.53 J2.59 J3.A1B12 J3.B1A12 J3.S1 J3.S2 J3.S3 J3.S4 P1.6 P1.9 P1.12 P1.14 P1.17 P1.20 P1.23 P3.2 R7.1 R8.1 R10.2 U3.1 U4.1
GPADC0: J2.67
LCD_SPI_RST: J2.68
LINEOUTP: J2.65
MCSI-CK_N: J2.45 P1.16
MCSI-CK_P: J2.43 P1.15
MCSI-D0_N: J2.57 P1.22
MCSI-D0_P: J2.55 P1.21
MCSI-D1_N: J2.49 P1.18
MCSI-D1_P: J2.51 P1.19
MCSI-MCLK: J2.34 P1.13
MCSI-PWDN: J2.26 P1.2 R4.2
MCSI-RSTN: J2.28 P1.3 R6.2
MICIN1N: J2.63
MICIN1P: J2.61
NetD1_2: D1.2 R9.1
NetD2_2: D2.2 R10.1
PF0: "TF CARD.8" J2.24
PF1: "TF CARD.7" J2.22
PF2: "TF CARD.5" J2.6
PF3: "TF CARD.3" J2.20
PF4: "TF CARD.2" J2.10
PF5: "TF CARD.1" J2.8
PF6: J2.4 P2.1
PG0: J2.48
PG1: J2.46
PG2: J2.44
PG3: J2.42
PG4: J2.38
PG5: J2.40
PG6: J2.32 P2.4
PG7: J2.30 P2.3
PH0: J2.69
PH1: J2.71
PH2: J2.73
PH3: J2.75
PH4: J2.70
PH6: J2.66
PH7: J2.64
PH8: J2.62
PH11: J2.56 P2.6
PH12: J2.54 P2.5
PH13: J2.52 P2.8
PH14: J2.50 P2.7 R9.2
PI1: J2.35 P1.4 R3.2
PI2: J2.33 P1.5 R5.2
RST: P2.2 Q1.3
UART0_TX: P2.10 R11.2
USB0__N: J2.37 R1.1
USB0__P: J2.39 R2.1
USB0_N: J3.A7 J3.B7 R1.2
USB0_P: J3.A6 J3.B6 R2.2
V831_LCD_CLK: J2.7
V831_LCD_D3: J2.31
V831_LCD_D4: J2.29
V831_LCD_D5: J2.27
V831_LCD_D6: J2.25
V831_LCD_D7: J2.23
V831_LCD_D10: J2.21
V831_LCD_D11: J2.11
V831_LCD_D12: J2.9
V831_LCD_DE: J2.5
V831_LCD_HSYNC: J2.3
V831_LCD_VSYNC: J2.1
pads on no net: "J2. " "TF CARD." "TF CARD.CD1" J2.72 J2.SH1 J2.SH2 J3. J3.A8 J3.B8 P1.7 P1.8 P1.10 P1.11 U1.1 U1.2 U1.3 U1.4 U2.1 U2.2 U2.3 U2.4
copper on no net:
  other v1: 569.21,714.33 569.21,1005.67

## Polygon pours and split planes (outlines as drawn)
GND on Int1 (GND) "NONET_L02_P000" (solid, shelved, pour order 0): 0.25,197.1 0.25,512.06 cw(c78.99,512.06) 78.99,590.8 157.73,590.8 ccw(c157.73,630.17) 197.1,630.17 197.1,1409.7 cw(c275.84,1409.7) 275.84,1488.44 1291.59,1488.44 cw(c1291.59,1409.7) 1370.33,1409.7 1370.33,630.17 ccw(c1409.7,630.17) 1409.7,590.8 1488.44,590.8 cw(c1488.44,512.06) 1567.18,512.06 1567.18,197.1 cw(c1370.33,197.1) 1370.33,0.25 197.1,0.25 cw(c197.1,197.1)
3V3 on Int2 (PWR) "NONET_L03_P001" (solid, shelved, pour order 1): 0.25,197.1 0.25,512.06 cw(c78.99,512.06) 78.99,590.8 157.73,590.8 ccw(c157.73,630.17) 197.1,630.17 197.1,1409.7 cw(c275.84,1409.7) 275.84,1488.44 1291.59,1488.44 cw(c1291.59,1409.7) 1370.33,1409.7 1370.33,630.17 ccw(c1409.7,630.17) 1409.7,590.8 1488.44,590.8 cw(c1488.44,512.06) 1567.18,512.06 1567.18,197.1 cw(c1370.33,197.1) 1370.33,0.25 197.1,0.25 cw(c197.1,197.1)

## Silkscreen, mask and mechanical layers (free items; w line width, h text height)
Bottom Overlay:
  text "L1" at 678.98,1368.27 h60
  text "L2" at 678.98,1112.36 h60
  text "R1" at 767.56,895.83 h60
  text "R2" at 767.56,639.92 h60
Mechanical 1:
  circle w0.5: c271.9,543.56 r29.53
  circle w0.5: c1295.53,543.56 r29.53
  lines w0.5: 0.25,197.1 ccw(c197.1,197.1) 197.1,0.25 1370.33,0.25 ccw(c1370.33,197.1) 1567.18,197.1 1567.18,512.06 ccw(c1488.44,512.06) 1488.44,590.8 1409.7,590.8 cw(c1409.7,630.17) 1370.33,630.17 1370.33,1409.7 ccw(c1291.59,1409.7) 1291.59,1488.44 275.84,1488.44 ccw(c275.84,1409.7) 197.1,1409.7 197.1,630.17 cw(c157.73,630.17) 157.73,590.8 78.99,590.8 ccw(c78.99,512.06) 0.25,512.06 0.25,197.1

## Text inside footprints (layer, text, board x,y; h text height)
J2: Mechanical 9 "NGFF-67P_B" at 2310.63,1229.53 h20; Mechanical 8 "11" at 2093.31,1439.68 h20; Mechanical 8 "9" at 2073.62,1423.68 h20; Mechanical 8 "31" at 2309.84,1439.68 h20; Mechanical 8 "51" at 2506.69,1439.68 h20; Mechanical 8 "39" at 2388.58,1439.68 h20; Mechanical 8 "37" at 2368.9,1439.68 h20; Mechanical 8 "30" at 2300,1142.43 h20; Mechanical 8 "10" at 2083.47,1142.43 h20; Mechanical 8 "SH1" at 1971.26,1425.16 h20; Mechanical 8 "6" at 2044.09,1126.43 h20; Mechanical 8 "8" at 2063.78,1126.43 h20; Mechanical 8 "7" at 2053.94,1423.68 h20; Mechanical 8 "5" at 2034.25,1423.68 h20; Mechanical 8 "SH2" at 2786.22,1425.16 h20; Mechanical 8 "49" at 2487.01,1439.68 h20; Mechanical 8 "33" at 2329.53,1439.68 h20; Mechanical 8 "35" at 2349.21,1439.68 h20; Mechanical 8 "42" at 2418.11,1142.43 h20; Mechanical 8 "29" at 2290.16,1439.68 h20; Mechanical 8 "47" at 2467.32,1439.68 h20; Mechanical 8 "45" at 2447.64,1439.68 h20; Mechanical 8 "43" at 2427.95,1439.68 h20; Mechanical 8 "41" at 2408.27,1439.68 h20; Mechanical 8 "67" at 2664.17,1439.68 h20; Mechanical 8 "65" at 2644.49,1439.68 h20; Mechanical 8 "61" at 2605.12,1439.68 h20; Mechanical 8 "63" at 2624.8,1439.68 h20; Mechanical 8 "57" at 2565.75,1439.68 h20; Mechanical 8 "59" at 2585.43,1439.68 h20; Mechanical 8 "55" at 2546.06,1439.68 h20; Mechanical 8 "53" at 2526.38,1439.68 h20; Mechanical 8 "68" at 2674.02,1142.43 h20; Mechanical 8 "52" at 2516.53,1142.43 h20; Mechanical 8 "64" at 2634.65,1142.43 h20; Mechanical 8 "66" at 2654.33,1142.43 h20; Mechanical 8 "60" at 2595.28,1142.43 h20; Mechanical 8 "62" at 2614.96,1142.43 h20; Mechanical 8 "50" at 2496.85,1142.43 h20; Mechanical 8 "48" at 2477.16,1142.43 h20; Mechanical 8 "54" at 2536.22,1142.43 h20; Mechanical 8 "70" at 2693.7,1142.43 h20; Mechanical 8 "58" at 2575.59,1142.43 h20; Mechanical 8 "56" at 2555.91,1142.43 h20; Mechanical 8 "71" at 2703.54,1439.68 h20; Mechanical 8 "69" at 2683.86,1439.68 h20; Mechanical 8 "2" at 2004.72,1126.43 h20; Mechanical 8 "3" at 2014.57,1423.68 h20; Mechanical 8 "1" at 1994.88,1423.68 h20; Mechanical 8 "4" at 2024.41,1126.43 h20; Mechanical 8 "73" at 2723.23,1439.68 h20; Mechanical 8 "75" at 2742.91,1439.68 h20; Mechanical 8 "32" at 2319.68,1142.43 h20; Mechanical 8 "34" at 2339.37,1142.43 h20; Mechanical 8 "72" at 2713.39,1142.43 h20; Mechanical 8 "74" at 2733.07,1142.43 h20; Mechanical 8 "46" at 2457.48,1142.43 h20; Mechanical 8 "24" at 2240.95,1142.43 h20; Mechanical 8 "26" at 2260.63,1142.43 h20; Mechanical 8 "44" at 2437.8,1142.43 h20; Mechanical 8 "27" at 2270.47,1439.68 h20; Mechanical 8 "25" at 2250.79,1439.68 h20; Mechanical 8 "23" at 2231.1,1439.68 h20; Mechanical 8 "21" at 2211.42,1439.68 h20; Mechanical 8 "40" at 2398.43,1142.43 h20; Mechanical 8 "20" at 2201.57,1142.43 h20; Mechanical 8 "22" at 2221.26,1142.43 h20; Mechanical 8 "28" at 2280.32,1142.43 h20; Mechanical 8 "36" at 2359.05,1142.43 h20; Mechanical 8 "38" at 2378.74,1142.43 h20